# Altium PCB PCB_Germany_M8N_V4_2022-05-04.pcbdoc
Units mil, origin at the board's own origin, x right, y up, seen from the top; angles counter-clockwise.
Board outline 5430 x 3520 mil, 2 copper layers (Top Layer, Bottom Layer); 62 components, 48 nets, 204 pads, 70 vias.
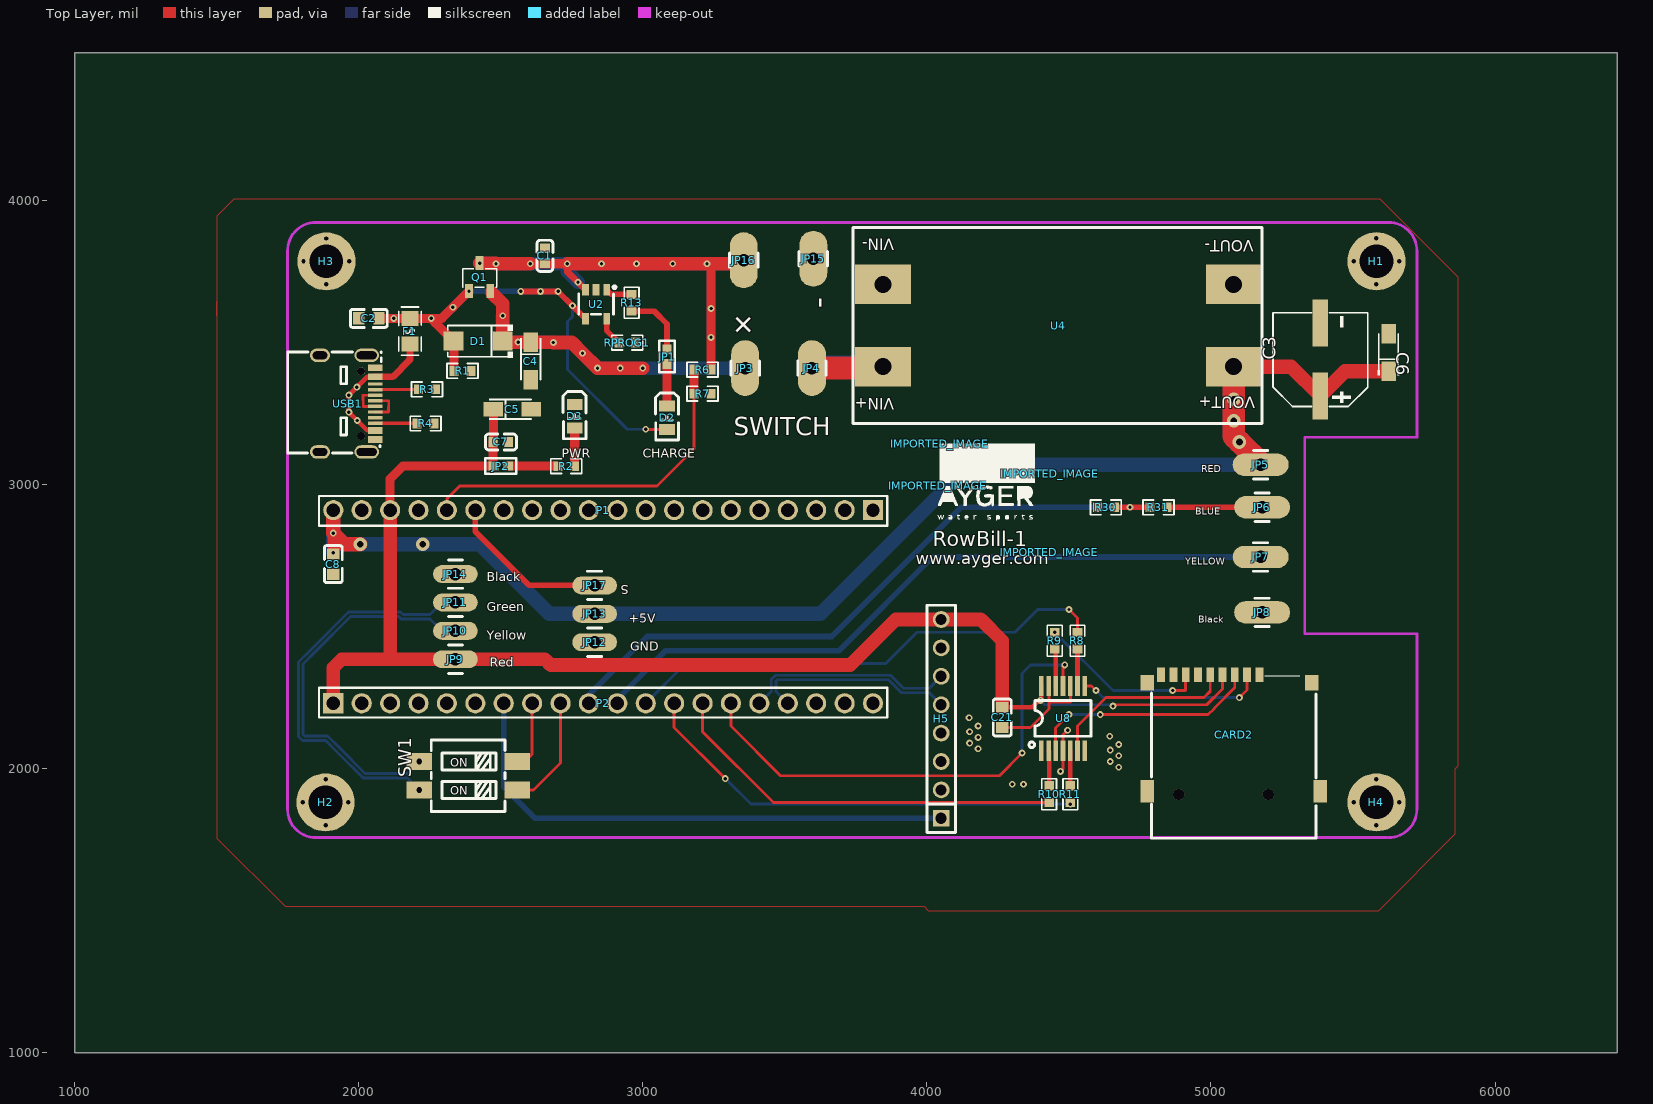
[diagram p0: Top Layer view]
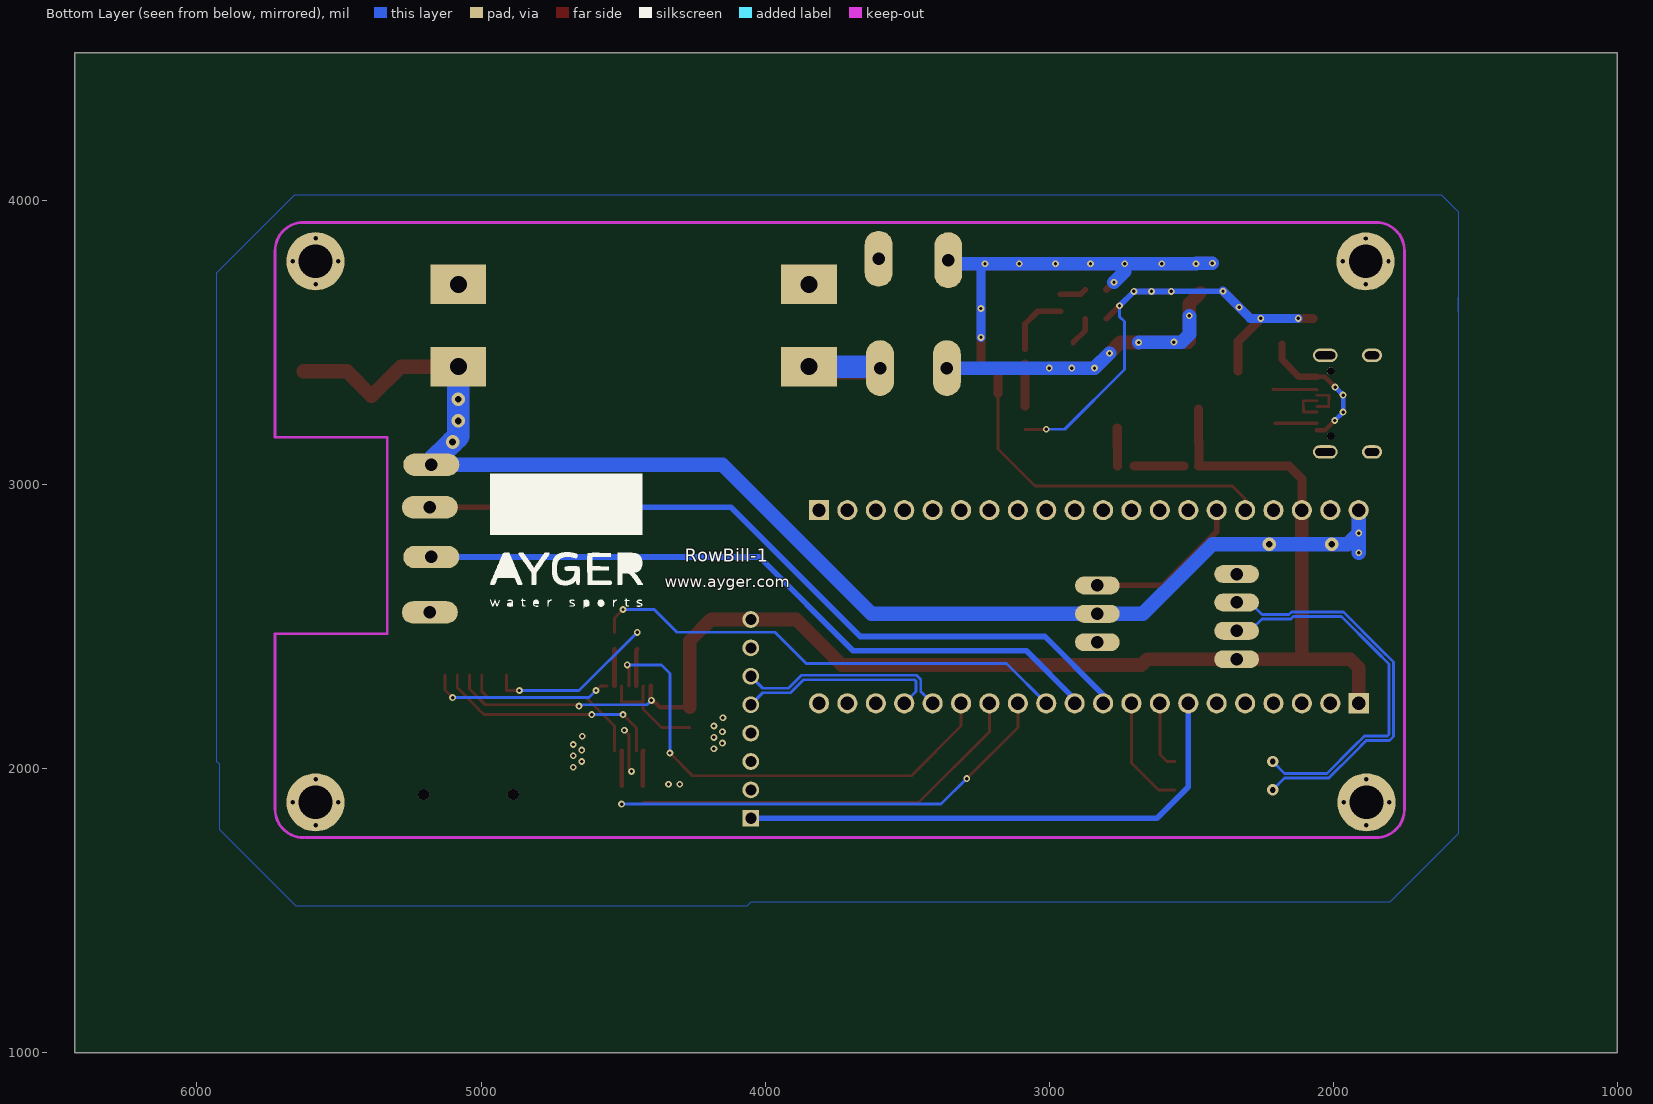
[diagram p1: Bottom Layer view, seen from below]

## Layer stack, top to bottom
Top Layer: signal copper (thickness not stored)
Dielectric: dielectric 12.6, FR-4, Dk 4.8
Bottom Layer: signal copper (thickness not stored)

## Board outline
6430,1000 1000,1000 1000,4520 6430,4520

## Components (designator, comment, footprint, x,y, rotation, side; value= is the part's Value field where it differs from the comment)
C1 "10uF" C0603#1 2655,3805 r270 top
C2 "100n" C0603#2 2035,3585 r180 top
C3 "470uF" CAP-SMD_BD8.0-L8.3-W8.3-FD 5385,3440 r90 top
C4 "10uF" CAP-SMD_L3.2-W1.6-R-RD 2605,3435 r90 top
C5 "10uF" CAP-SMD_L3.2-W1.6-R-RD 2540,3265 r180 top
C6 "10uF" CAP-SMD_L3.2-W1.6-R-RD 5625,3465 r270 top
C7 "1uF" C0603#1 2500,3150 r180 top
C8 "100n" C0603#2 1910,2720 r90 top
C21 "100n" C0603#2 4265,2180 r270 top
CARD2 "TF-01A" TF-SMD_TF-01A 5080,2125 r0 top
D1 "SS14D" SMA_L4.4-W2.6-LS5.0-RD 2420,3505 r180 top
D2 "TJ-S2012SW8TGLC6B-A5" LED0805-R-RD 3085,3235 r270 top
D3 "TJ-S2012SW8TGLC6B-A5" LED0805-R-RD 2760,3240 r270 top
F1 "0805L075WR" F0805 2180,3540 r270 top
H1 "SCREW HOLE 3MM" "HOLE 3MM A" 5582.6,3786 r0 top
H2 "SCREW HOLE 3MM" "HOLE 3MM A" 1882.6,1881 r0 top
H3 "SCREW HOLE 3MM" "HOLE 3MM A" 1885.8,3785.6 r0 top
H4 "SCREW HOLE 3MM" "HOLE 3MM A" 5582.6,1881 r0 top
H5 "Header-Male-2.54_1x8" HDR-TH_8P-P2.54-V-M 4050,2175 r90 top
IMPORTED_IMAGE "IMPORTED_IMAGE" IMPORTED_IMAGE 4430.73,2761.4 r0 top
IMPORTED_IMAGE "IMPORTED_IMAGE" IMPORTED_IMAGE 4432.25,3037.25 r0 top
IMPORTED_IMAGE "IMPORTED_IMAGE" IMPORTED_IMAGE 4045,3143.4 r0 top
IMPORTED_IMAGE "IMPORTED_IMAGE" IMPORTED_IMAGE 4038.48,2995.87 r0 top
JP1 "JP" C0402 3085,3425 r90 top
JP2 "JP" C0402 2525,3065 r180 top
JP3 "M01PTH_LONGPAD" 1X01_LONGPAD#1 3360,3410 r0 top
JP4 "M01PTH_LONGPAD" 1X01_LONGPAD#1 3595,3410 r0 top
JP5 "M01PTH_LONGPAD" 1X01_LONGPAD#2 5175,3070 r90 top
JP6 "M01PTH_LONGPAD" 1X01_LONGPAD#2 5180,2920 r90 top
JP7 "M01PTH_LONGPAD" 1X01_LONGPAD#2 5175,2745 r90 top
JP8 "M01PTH_LONGPAD" 1X01_LONGPAD#2 5180,2550 r90 top
JP9 "M01PTH_LONGPAD" 1X01_LONGPAD#3 2340,2385 r90 top
JP10 "M01PTH_LONGPAD" 1X01_LONGPAD#3 2340,2485 r270 top
JP11 "M01PTH_LONGPAD" 1X01_LONGPAD#3 2340,2585 r90 top
JP12 "M01PTH_LONGPAD" 1X01_LONGPAD#3 2830,2445 r270 top
JP13 "M01PTH_LONGPAD" 1X01_LONGPAD#3 2830,2545 r270 top
JP14 "M01PTH_LONGPAD" 1X01_LONGPAD#3 2340,2685 r90 top
JP15 "M01PTH_LONGPAD" 1X01_LONGPAD#1 3600,3795 r0 top
JP16 "M01PTH_LONGPAD" 1X01_LONGPAD#1 3355,3790 r0 top
JP17 "M01PTH_LONGPAD" 1X01_LONGPAD#3 2830,2645 r90 top
P1 "Header-Female-2.54_1x20" HDR-TH_20P-P2.54-V-F 2860,2910 r180 top
P2 "Header-Female-2.54_1x20" HDR-TH_20P-P2.54-V-F 2860,2230 r0 top
Q1 "DMG3415U-7" SOT-23-3_L2.9-W1.6-P1.90-LS2.8-BR-CW 2425,3730 r270 top
R1 "100k" R0603 2365,3400 r180 top
R2 "3.3k" R0603 2730,3065 r180 top
R3 "5.1k" R0603 2240,3335 r0 top
R4 "5.1k" R0603 2235,3215 r0 top
R6 "100k" R0603 3210,3405 r0 top
R7 "100k" R0603 3210,3320 r180 top
R8 "3.3k" R0603 4530,2450 r270 top
R9 "3.3k" R0603 4450,2450 r270 top
R10 "3.3k" R0603 4430,1910 r270 top
R11 "3.3k" R0603 4505,1910 r270 top
R13 "1.3k" R0603 2960,3640 r270 top
R30 "2K" R0603 4630,2920 r180 top
R31 "1K" R0603 4815,2920 r0 top
RPROG1 "2k" R0603 2945,3500 r180 top
SW1 "DM-02-V" SW-SMD_DM-02-V 2385,1975 r90 top
U2 "MCP73831T-2ACI/OT" SOT-23-5_L3.0-W1.7-P0.95-LS2.8-BR 2835,3635 r90 top
U4 "MT3608" MT3608-1 5180,3215 r180 top
U8 "74LVC125APW,118" TSSOP-14 4485,2175 r90 top
USB1 "U262-16XN-4BVC11" USB-3.1-SMD_U262-161N-4BVC11 1960,3285 r270 top

## Footprints (in the part's own frame and the unit in brackets; to place one, negate y for a bottom-side part, rotate by r counter-clockwise, add the part's x,y. Pads: shape width x height; smd on the part's side, far side on the other; paste and mask are expansions set on the pad)
1X01_LONGPAD#1 [mm]
  oval 2.5x5 hole 1.118: 1(0,0)
  silkscreen extent -1.27,-0.64 1.27,0.64
1X01_LONGPAD#2 [mm]
  oval 2x5 hole 1.118: 1(0,0)
  silkscreen extent -1.27,-0.64 1.27,0.64
1X01_LONGPAD#3 [mm]
  oval 1.6x4 hole 1.118: 1(0,0)
  silkscreen extent -1.27,-0.64 1.27,0.64
C0402 [mil]
  rect 35.4x31.5 smd: 1(0,0) 2(51.2,0)
  silkscreen extent -30,-28 81,28
C0603#1 [mm]
  rect 0.8x0.9 smd: 1(-0.7,0) 2(0.7,0)
  silkscreen extent -1.41,-0.71 1.39,0.72
C0603#2 [mm]
  rect 1x1.1 smd: 1(-0.9,0) 2(0.9,0)
  silkscreen extent -1.65,-0.8 1.65,0.8
CAP-SMD_BD8.0-L8.3-W8.3-FD [mm]
  rect 4.2x1.4 smd: 1(-3.267,0) 2(3.267,0)
  silkscreen extent -4.2,-4.23 4.2,4.23
CAP-SMD_L3.2-W1.6-R-RD [mil]
  rect 69.19x51.02 smd: 1(66.39,0) 2(-66.39,0)
  silkscreen extent -66,-37 81,37
F0805 [mm]
  rect 1.335x1.5 smd: 1(-1.142,0) 2(1.142,0)
  silkscreen extent -2.16,-1.02 2.16,1.02
HDR-TH_8P-P2.54-V-M [mm]
  rect 1.5x1.5 hole 1: 1(-8.89,0)
  round 1.5 hole 1: 2(-6.35,0) 3(-3.81,0) 4(-1.27,0) 5(1.27,0) 6(3.81,0) 7(6.35,0) 8(8.89,0)
  silkscreen extent -10.16,-1.27 10.16,1.27
HDR-TH_20P-P2.54-V-F [mm]
  rect 1.8x1.8 hole 1.2: 1(-24.13,0)
  round 1.8 hole 1.2: 2(-21.59,0) 3(-19.05,0) 4(-16.51,0) 5(-13.97,0) 6(-11.43,0) 7(-8.89,0) 8(-6.35,0) 9(-3.81,0) 10(-1.27,0) 11(1.27,0) 12(3.81,0) 13(6.35,0) 14(8.89,0) 15(11.43,0) 16(13.97,0) 17(16.51,0) 18(19.05,0) 19(21.59,0) 20(24.13,0)
  silkscreen extent -25.4,-1.27 25.4,1.4
"HOLE 3MM A" [mil]
  round 31.5 hole 15.8: ""(-80.71,0) ""(0,-80.71) ""(0,80.71) ""(80.71,0)
  round 204.72 hole 118.11: ""(0,0)
IMPORTED_IMAGE [mil]
LED0805-R-RD [mm]
  rect 1x1.4 smd: 1(1.05,0) 2(-1.05,0)
  silkscreen extent -2.22,-1.04 1.99,1.01
MT3608-1 [mil]
  rect 196.85x137.79 hole 60: 1(100,-200) 2(100,-490) 3(1335,-200) 4(1335,-490)
  silkscreen extent 0,-690 1440,0
R0603 [mil]
  rect 31.75x34.02 smd: 1(-29.66,0) 2(29.66,0)
  silkscreen extent -55,-26 55,26
SMA_L4.4-W2.6-LS5.0-RD [mm]
  rect 1.8x1.7 smd: 1(-2.192,0) 2(2.192,0)
  silkscreen extent -3.11,-1.48 2.73,1.48
SOT-23-3_L2.9-W1.6-P1.90-LS2.8-BR-CW [mm]
  rect 1.25x0.7 smd: 1(1.25,-0.95) 2(-1.25,0) 3(1.25,0.95)
  silkscreen extent -0.76,-1.52 0.89,1.52
SOT-23-5_L3.0-W1.7-P0.95-LS2.8-BR [mm]
  rect 1x0.6 smd: 1(1.3,-0.95) 2(1.3,0) 3(1.3,0.95) 4(-1.3,0.95) 5(-1.3,-0.95)
  silkscreen extent -0.9,-1.78 1.65,1.55
SW-SMD_DM-02-V [mil]
  rect 60x90 smd: 1(-50,-172.24) 2(50,-172.24) 3(50,172.24) 4(-50,172.24)
  silkscreen extent -126,-130 126,130
TF-SMD_TF-01A [mm]
  rect 0.7x1.3 smd: 1(2.292,5.2) 2(1.192,5.198) 3(0.096,5.2) 4(-1.004,5.2) 5(-2.103,5.2) 6(-3.201,5.2) 7(-4.297,5.2) 8(-5.395,5.2) 9(-6.499,5.2)
  rect 1.2x1.397 smd: 10(-7.747,4.502) 13(6.985,4.502)
  rect 1.2x2 smd: 11(-7.747,-5.2) 12(7.747,-5.2)
  round 1 hole 1 unplated: ""(-4.915,-5.49) ""(3.084,-5.487)
  silkscreen extent -7.37,-9.4 7.37,5.14
TSSOP-14 [mil]
  rect 71x16 smd: 1(-112,83) 2(-112,57) 3(-112,32) 4(-112,6) 5(-112,-20) 6(-112,-45) 7(-112,-71) 8(116,-71) 9(116,-45) 10(116,-20) 11(116,6) 12(116,32) 13(116,57) 14(116,83)
  silkscreen extent -101,-92 65,126
USB-3.1-SMD_U262-161N-4BVC11 [mm]
  rect 0.6x1.3 smd: A1B12(-3.2,2.461) A4B9(-2.4,2.461) B1A12(3.2,2.461) B4A9(2.4,2.461)
  rect 0.3x1.3 smd: A5(-1.25,2.461) A6(-0.25,2.461) A7(0.25,2.461) A8(1.25,2.461) B5(1.75,2.461) B6(0.75,2.461) B7(-0.75,2.461) B8(-1.75,2.461)
  oval 1.2x2.2 hole 0.7 slot 1.8 at 90 deg: SHELL(-4.32,1.719) SHELL(4.32,1.719)
  oval 1.2x1.8 hole 0.7 slot 1.3 at 90 deg: SHELL(-4.32,-2.461) SHELL(4.32,-2.461)
  round 0.7 hole 0.7 unplated: ""(-2.89,1.219) ""(2.89,1.219)
  silkscreen extent -4.62,-5.35 4.42,3.01

## Via types
v1: diameter 24, hole 12, Top Layer to Bottom Layer, tented both sides, 63 vias
v2: diameter 48, hole 24, Top Layer to Bottom Layer, tented both sides, 5 vias
v3: diameter 40, hole 20, Top Layer to Bottom Layer, tented both sides, 2 vias

## Nets (pads, with @x,y where several pads share a name; then routed paths per layer and width w, separated by ;. In a path a pad name is that pad's centre, name@x,y a point inside that pad or via, vN(x,y) a via of type N, cw(c..) or ccw(c..) an arc to the next point about the centre after c; other vN are vias at no path point)
+3.3V: C5.1 C7.2 C21.1 CARD2.4 H5.8 JP2.2 JP9.1 P1.18 P2.1 U8.14 | length 5025.7
  Top Layer w10: v1(4400,2240) 4402,2242 U8.14 ; v1(4655,2220) 4655,2225 4985,2225 5040.5,2280.5 CARD2.4
  Top Layer w16: C21.1 4369.6,2215.4 4402,2247 U8.14
  Top Layer w32: P1.18 2110,3020 2155,3065 JP2.2 2472.44,3066.36 C7.2 2473.61,3151.17 C5.1
  Top Layer w48: P2.1 1910,2355 1940,2385 JP9.1 2655,2385 2675,2365 3730,2365 3890,2525 H5.8 4190,2525 4265,2450 C21.1 ; 2110,2385 P1.18
  Bottom Layer w10: v1(4400,2240) 4415,2225 4655,2225 v1(4655,2220)
+5V: C3.1 C6.1 C8.2 JP5.1 JP13.1 P1.20 U4.1 | length 6263.6
  Top Layer w40: C8.2 P1.20 ; U4.1 5281.37,3415 C3.1 5472.24,3398.61 C6.1
  Top Layer w50: P1.20 v1(1910,2829.2) 1949.2,2790 v2(2005,2790) ; U4.1 5281.37,3415 C3.1 5472.24,3398.61 C6.1
  Top Layer w80: U4.1 v2(5080,3300.25) v2(5080,3224.25) 5080,3170 v2(5100,3150) 5175,3075 JP5.1
  Bottom Layer w30: v1(1910,2760) v1(1910,2829.2) P1.20
  Bottom Layer w50: v1(1910,2760) v1(1910,2829.2) ; P1.20 v1(1910,2829.2) ; JP5.1 4150,3070 3625,2545 JP13.1 2670,2545 2517.45,2697.55 2425,2790 v2(2224.75,2790) 1949.2,2790 v1(1910,2829.2)
  Bottom Layer w80: U4.1 5080,3170 v2(5100,3150) 5175,3075 JP5.1
BATT+: C1.2 JP16.1 Q1.2 R6.2 U2.3 | length 4478.7
  Top Layer w24: v1(2733.46,3777.44) 2733.5,3750.3 v1(2771.5,3712.3) U2.3
  Top Layer w32: v1(2425,3779.2) 2426.76,3777.44 v1(2482.87,3777.44) 2553.53,3777.44 C1.2 v1(2733.46,3777.44) 2864.2,3777.44 2997.53,3777.44 3114.87,3777.44 v1(3225.54,3777.44) ; R6.2 3240,3405.34 v1(3240,3620) ; v1(3239.66,3518.17) v1(3240,3620) ; JP16.1 3342.44,3777.44 v1(3225.54,3777.44) ; v1(3225.54,3777.44) 3240,3762.97 v1(3240,3620)
  Top Layer w48: v1(2425,3779.2) 2481.11,3779.2 v1(2482.87,3777.44) v1(2603.54,3777.44) ; v1(2733.46,3777.44) v1(2854.2,3777.44) ; v1@2864.2,3777.44 v1(2977.54,3777.44) v1(3104.87,3777.44) v1(3225.54,3777.44) 3342.44,3777.44 JP16.1
  Bottom Layer w32: v1(2482.87,3777.44) v1(3225.54,3777.44) ; v1(3239.66,3518.17) v1(3240,3620) 3240,3762.97 v1(3225.54,3777.44) ; JP16.1 3342.44,3777.44 v1(3225.54,3777.44)
  Bottom Layer w48: v1(2425,3779.2) 2481.11,3779.2 v1(2482.87,3777.44) v1(2603.54,3777.44) v1(2733.46,3777.44) ; v1(2771.5,3712.3) 2733.47,3750.34 v1(2733.46,3777.44) ; v1@3094.1,3777.44 v1(2977.54,3777.44) v1(2854.2,3777.44) v1(2733.46,3777.44) ; v1(3104.87,3777.44) v1(3225.54,3777.44) 3342.44,3777.44 JP16.1
BATTERYIN: P1.16 R6.1 R7.2 | length 1347.6
  Top Layer w10: P1.16 2310,2950 2355,2995 3050,2995 3180.34,3125.34 R7.2
  Top Layer w20: R7.2 R6.1
  Top Layer w32: R7.2 R6.1
BLUE: JP6.1 R31.2 | length 335.3
  Top Layer w20: R31.2 JP6.1
BOOST: JP4.1 U4.3 | length 504.1
  Top Layer w80: JP4.1 3840,3410 U4.3
  Bottom Layer w80: JP4.1 3600,3415 U4.3
CC1: R3.1 USB1.A5 | length 153.4
  Top Layer w12: USB1.A5 R3.1
CC2: R4.1 USB1.B5 | length 148.9
  Top Layer w12: USB1.B5 2204.24,3216.1 R4.1
CS_I: P2.12 R8.1 | length 1719.5
  Top Layer w10: v1(4500,2560) 4530,2530 R8.1
  Bottom Layer w10: P2.12 3150,2370 3170,2370 3855,2370 3965,2480 4310,2480 4370,2540 4390,2560 v1(4500,2560)
CS_O: CARD2.2 U8.8 | length 651.8
  Top Layer w10: U8.8 4579,2291 v1(4595,2275) ; v1(5100,2250) 5126.93,2276.93 CARD2.2
  Bottom Layer w10: v1(4595,2275) 4620,2250 4690,2250 v1(5100,2250)
D+: USB1.A6 USB1.B6 | length 135
  Top Layer w10: USB1.B6 2104.5,3255.5 2105,3294.8 USB1.A6
D-: USB1.A7 USB1.B7 | length 122.9
  Top Layer w10: USB1.A7 2015.2,3275.2 2015,3314.5 USB1.B7
GND: C1.1 C2.2 C3.2 C4.2 C5.2 C6.2 C7.1 C8.1 C21.2 CARD2.6 D3.2 H5.7 JP8.1 JP12.1 JP14.1 JP15.1 P1.19 P2.2 R1.1 R3.2 R4.2 R7.1 R30.2 RPROG1.1 U2.2 U4.2 U4.4 U8.1 U8.4 U8.7 U8.10 U8.13 USB1.A1B12 USB1.B1A12 | length 560.3
  Top Layer w10: C21.2 4364.56,2144.56 4430,2210 4430,2289 U8.13 ; 4430,2235 4505,2235 U8.10 ; v1(4470,1990) 4479,1999 U8.4 4479,2119 v1(4495,2135)
  other v1: 4300,1945 4340,1945 4675,2005 4645,2025 4675,2045 4645,2065 4180,2070 4675,2085 4150,2090 4180,2110 4643.56,2113.77 4150,2130 4180,2150 4148.56,2178.77
GPS+: JP11.1 SW1.4 | length 1411.2
  Bottom Layer w10: v3(2212.76,1925) 2170.76,1967 2128.76,1967 2015.37,1967 1923.37,2059 1883.37,2099 1815,2099 1801.52,2099 1787.57,2112.94 1787.57,2375.2 1834,2421.63 1963.37,2551 2080,2551 2147.01,2551 2155.01,2543 2208.76,2543 2250.76,2543 2292.76,2585 JP11.1
GPS-: JP10.1 SW1.3 | length 1358.2
  Bottom Layer w10: v3(2212.76,2025) 2170.76,1983 2128.76,1983 2022,1983 1930,2075 1890,2115 1815,2115 1808.14,2115 1803.57,2119.57 1803.57,2368.57 1850,2415 1970,2535 2080,2535 2140.38,2535 2148.38,2527 2208.76,2527 2250.76,2527 2292.76,2485 JP10.1
HALL_EFFECT: JP17.1 P1.15 | length 573.7
  Top Layer w20: P1.15 2410,2835 2600,2645 JP17.1
IMU_N: H5.6 P2.16 | length 741.8
  Bottom Layer w10: P2.16 3452,2272 3452,2314 3466.71,2328.71 3871.28,2328.71 3885,2315 3917,2283 3966,2283 4008,2283 H5.6
IMU_P: H5.5 P2.17 | length 715.3
  Bottom Layer w10: P2.17 3468,2272 3468,2307.37 3473.34,2312.71 3864.66,2312.71 3878.37,2299 3910.37,2267 3966,2267 4008,2267 H5.5
IMUINT: H5.1 P2.7 | length 1880.6
  Bottom Layer w20: P2.7 2510,1935 2620,1825 H5.1
JP1_1: D2.2 JP1.1 | length 148.7
  Top Layer w32: D2.2 JP1.1
MISO_I: P2.15 U8.11 | length 1729.5
  Top Layer w10: P2.15 3310,2150 3485,1975 4255,1975 v1(4335,2055) ; U8.11 4479,2359 v1(4485,2365)
  Bottom Layer w10: v1(4335,2055) 4335,2335 4365,2365 4460,2365 v1(4485,2365)
MISO_O: CARD2.7 R9.1 | length 599.8
  Top Layer w10: v1(4865,2275) 4910,2275 4910.8,2275.8 CARD2.7
  Bottom Layer w10: v1(4450,2479.66) 4654.66,2275 v1(4865,2275)
MOSI_I: P2.14 R10.2 | length 1423.4
  Top Layer w10: P2.14 3210,2130 3459.66,1880.34 R10.2
MOSI_O: CARD2.3 U8.3 | length 815
  Top Layer w10: U8.3 4453,2143 v1(4500,2190) ; v1(4610,2190) 4655,2190 4990,2190 5010,2210 5010,2211.24 5083.76,2285 CARD2.3
  Bottom Layer w10: v1(4500,2190) v1(4610,2190)
P2_8: P2.8 SW1.2 | length 243.1
  Top Layer w10: SW1.2 2585,2025 2610,2050 P2.8
P2_9: P2.9 SW1.1 | length 402.1
  Top Layer w10: SW1.1 2615,1925 2710,2020 P2.9
R2_1: D3.1 R2.1 | length 133.6
  Top Layer w32: R2.1 D3.1
R2_2: JP2.1 R2.2 | length 175.3
  Top Layer w32: JP2.1 R2.2
R8_2: R8.2 U8.9 | length 129.3
  Top Layer w16: U8.9 R8.2
R9_2: R9.2 U8.12 | length 130.6
  Top Layer w16: R9.2 4453,2417.34 U8.12
R10_1: R10.1 U8.2 | length 124.2
  Top Layer w16: U8.2 4430,2061 R10.1
R11_1: R11.1 U8.5 | length 123.3
  Top Layer w16: R11.1 U8.5
R13_1: R13.1 U2.1 | length 94.4
  Top Layer w20: U2.1 2888.92,3669.66 R13.1
R13_2: JP1.2 R13.2 | length 232.6
  Top Layer w20: R13.2 3039.66,3610.34 3085,3565 JP1.2
R30_1: P2.10 R30.1 R31.1 | length 2334.1
  Top Layer w20: R30.1 v1(4715,2920) R31.1
  Bottom Layer w20: P2.10 2810,2260 3015,2465 3665,2465 4120,2920 v1(4715,2920)
RPROG1_2: RPROG1.2 U2.5 | length 101.6
  Top Layer w20: U2.5 2872.4,3542.94 RPROG1.2
S$41471: 
S$41473: 
S$8424924533955999: 
S$8424924533956001: 
S$8424924533956003: 
S$8424924533956023: 
SCK_I: P2.13 R11.2 | length 1591.8
  Top Layer w10: P2.13 3110,2145 v1(3290,1965)
  Bottom Layer w10: v1(3290,1965) 3380,1875 4250,1875 v1(4505,1875)
SCK_O: CARD2.5 U8.6 | length 724.3
  Top Layer w10: 4530,2125 U8.6 4530,2120 4530,2150 4630,2250 4975,2250 4997.2,2272.2 CARD2.5
VB: F1.2 USB1.A4B9 USB1.B4A9 | length 641.6
  Top Layer w16: USB1.B4A9 2029.49,3190.51 v1(1994.33,3225.67) v1(1965,3255) v1(1965,3315) v1(1993.11,3343.11) 2029.5,3379.5 USB1.A4B9
  Top Layer w24: USB1.A4B9 2119.49,3379.49 2180,3440 F1.2
  Bottom Layer w16: v1(1993.11,3343.11) v1(1965,3315) v1(1965,3255) v1(1994.33,3225.67)
VBUS: C2.1 D1.2 D2.1 F1.1 Q1.1 R1.2 U2.4 | length 2200.6
  Top Layer w10: v1(3010,3195) 3011.3,3193.6 D2.1
  Top Layer w20: v1(2570,3680) v1(2639.36,3680) v1(2701.41,3680) v1(2752.15,3629.26) U2.4
  Top Layer w32: C2.1 v1(2123.08,3585) F1.1 2253.7,3584.98 2268.89,3569.79 D1.2 2335.34,3503.34 R1.2 ; v1(2255,3585) 2291.8,3585 v1(2330.91,3624.11) v1(2387.6,3680.8)
  Bottom Layer w10: v1@2752.15,3629.26 2752.15,3590.97 2735,3573.82 2735,3405 2945,3195 v1(3010,3195)
  Bottom Layer w20: v1(2387.6,3680.8) v1(2570,3680) v1(2701.41,3680) v1(2752.15,3629.26)
  Bottom Layer w32: v1(2123.08,3585) v1(2255,3585) 2291.8,3585 v1(2387.6,3680.8)
VIN: C4.1 D1.1 JP3.1 Q1.3 | length 2672.6
  Top Layer w32: Q1.3 2506.32,3636.88 v1(2506.32,3594.36) D1.1 2509.93,3501.39 v1(2560.56,3501.39) C4.1 2748.61,3501.39 v1(2840,3410) v1(2920,3410)
  Top Layer w48: Q1.3@2470,3673 2506.32,3636.88 v1(2506.32,3594.36) D1.1 2509.93,3501.39 v1(2560.56,3501.39) 2683.54,3501.39 v1(2684.93,3500) 2750,3500 v1(2787.48,3462.52) v1(2840,3410) v1(2920,3410) v1(2999.47,3410)
  Bottom Layer w32: v1(2560.56,3501.39) 2683.54,3501.39 v1(2684.93,3500) 2610,3500 ; v1(2787.48,3462.52) v1(2840,3410) v1(2920,3410)
  Bottom Layer w48: v1(2684.93,3500) 2683.54,3501.39 v1(2560.56,3501.39) 2533.61,3501.39 ; v1(2787.48,3462.52) v1(2840,3410) v1(2920,3410) v1(2999.47,3410) JP3.1 ; 2533.61,3501.39 2506.32,3528.68 v1(2506.32,3594.36) 2505,3593.04 2505,3530 2533.61,3501.39
YELLOW: JP7.1 P2.11 | length 2487.1
  Bottom Layer w20: P2.11 2910,2245 3080,2415 3690,2415 4020,2745 JP7.1
pads on no net: CARD2. CARD2.1 CARD2.8 CARD2.9 CARD2.10 CARD2.11 CARD2.12 CARD2.13 H1. H2. H3. H4. H5.2 H5.3 H5.4 P1.1 P1.2 P1.3 P1.4 P1.5 P1.6 P1.7 P1.8 P1.9 P1.10 P1.11 P1.12 P1.13 P1.14 P1.17 P2.3 P2.4 P2.5 P2.6 P2.18 P2.19 P2.20 USB1. USB1.A8 USB1.B8 USB1.SHELL

## Polygon pours and split planes (outlines as drawn)
GND on Bottom Layer (solid): 1560,3660 1560,1770 1800,1530 4050,1530 4065,1515 5650,1515 5920,1785 5920,2015 5930,2025 5930,3745 5655,4020 5210,4020 1620,4020 1560,3960 1560,3610
GND on Top Layer (solid): 1500,3645 1500,1755 1740,1515 3990,1515 4005,1500 5590,1500 5860,1770 5860,2000 5870,2010 5870,3730 5595,4005 5150,4005 1560,4005 1500,3945 1500,3595

## Keep-outs
Keep-Out Layer:
  lines w10: 1748.91,1857.07 ccw(c1848.91,1857.07) 1848.91,1757.07 ; 1748.91,3823.07 cw(c1848.91,3823.07) 1848.91,3923.07 ; 5624.91,1757.07 ccw(c5624.91,1857.07) 5724.91,1857.07
  lines w10 net S$8424924533956023: 5624.91,3923.07 cw(c5624.91,3823.07) 5724.91,3823.07

## Silkscreen, mask and mechanical layers (free items; w line width, h text height)
Top Overlay:
  text "-" at 3595,3660 h80 r270
  text "+" at 3361.72,3618.28 h80 r225
  text "SWITCH" at 3320,3173.5 h62.99
  text "PWR" at 2715,3094 h32
  text "CHARGE" at 3000,3094 h32
  text "RED" at 4965,3043 h24
  text "BLUE" at 4945,2893 h24
  text "RowBill-1" at 4020,2765 h90
  text "YELLOW" at 4910,2718 h24
  text "www.ayger.com" at 3960,2705 h72
  text "Black" at 2450,2659.25 h31.5
  text "S" at 2950,2645.75 h31.5 r180
  text "Green" at 2450,2554.25 h31.5
  text "+5V" at 2950,2514.25 h31.5
  text "Black" at 4955,2513 h24
  text "Yellow" at 2450,2454.25 h31.5
  text "GND" at 2955,2414.25 h31.5
  text "Red" at 2460,2359.25 h31.5
Bottom Overlay:
  text "RowBill-1" at 4282.75,2712.5 h78.74
  text "www.ayger.com" at 4352.75,2625 h68.9

## Text inside footprints (layer, text, board x,y; h text height)
SW1: Top Overlay "ON" at 2322.01,2007.24 h30; Top Overlay "ON" at 2322.01,1907.24 h30
U4: Top Overlay "VOUT+" at 5155,3309.68 h39.37 r180; Top Overlay "VOUT-" at 5150,3859.68 h39.37 r180; Top Overlay "VIN+" at 3885,3304.68 h39.37 r180; Top Overlay "VIN-" at 3885,3864.68 h39.37 r180